# EAGLE board EEG_2 (EAGLE 9.2.2)
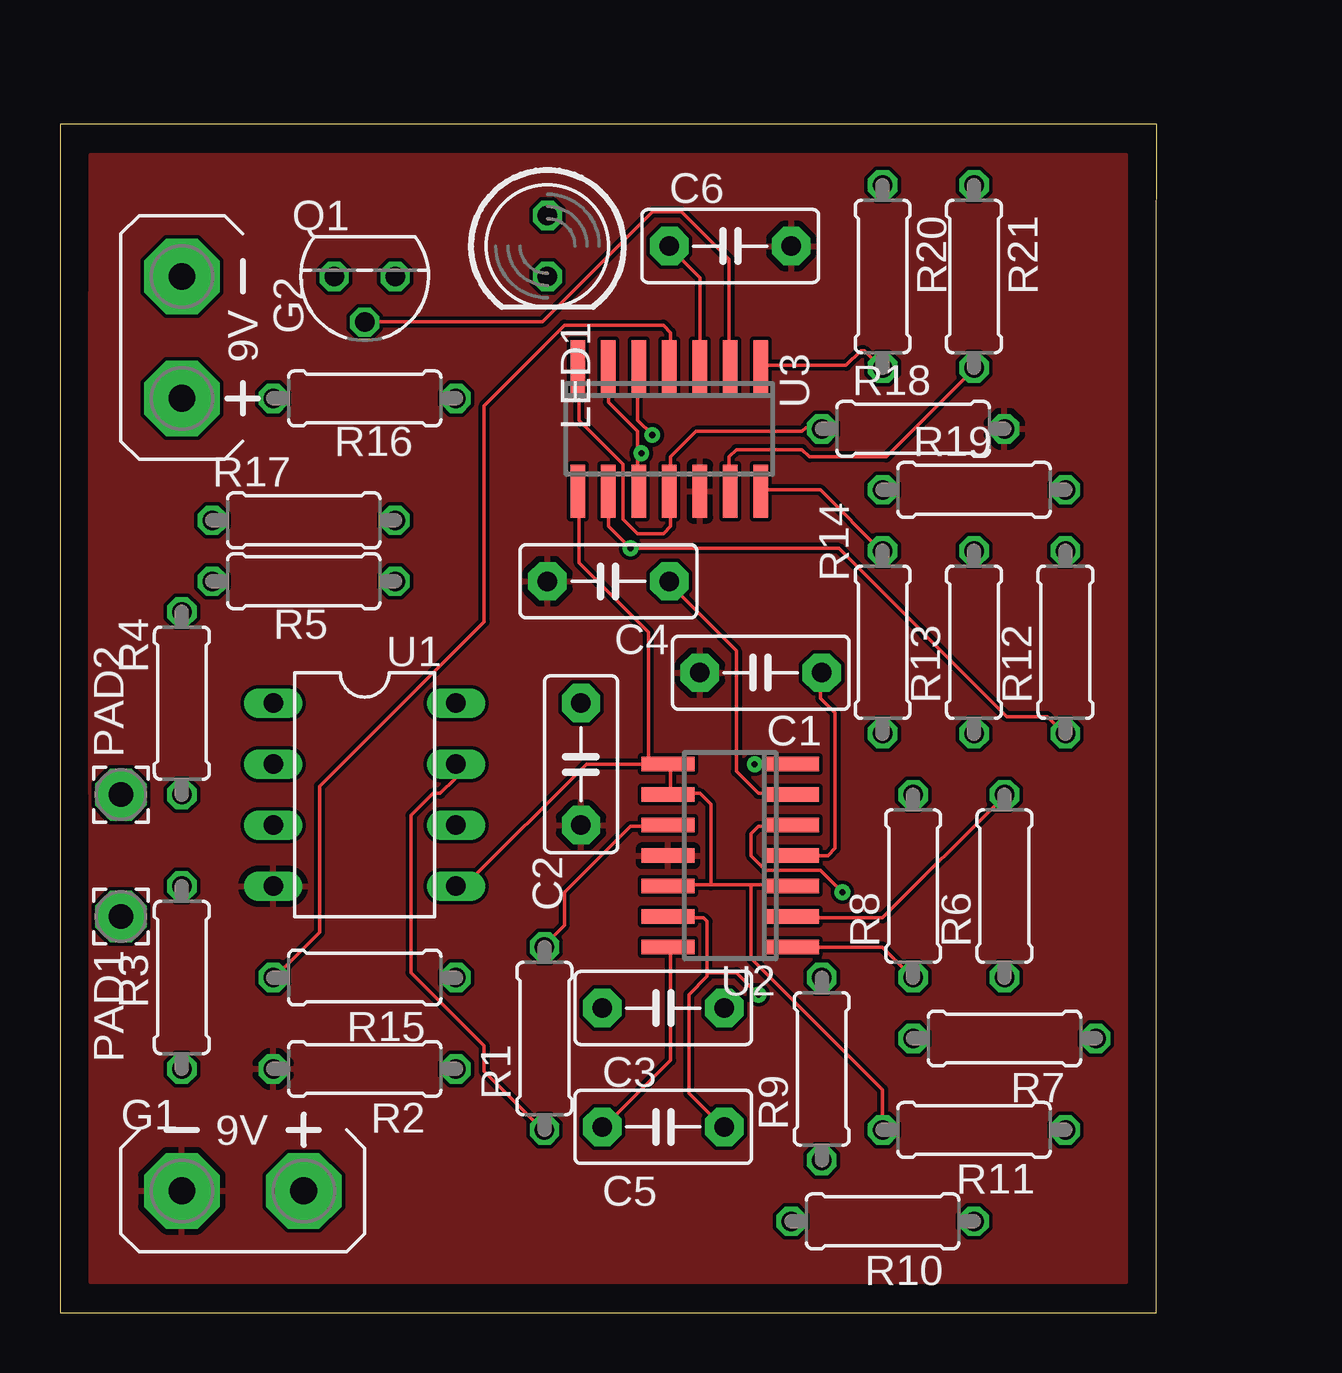
[diagram p0: board, top side]
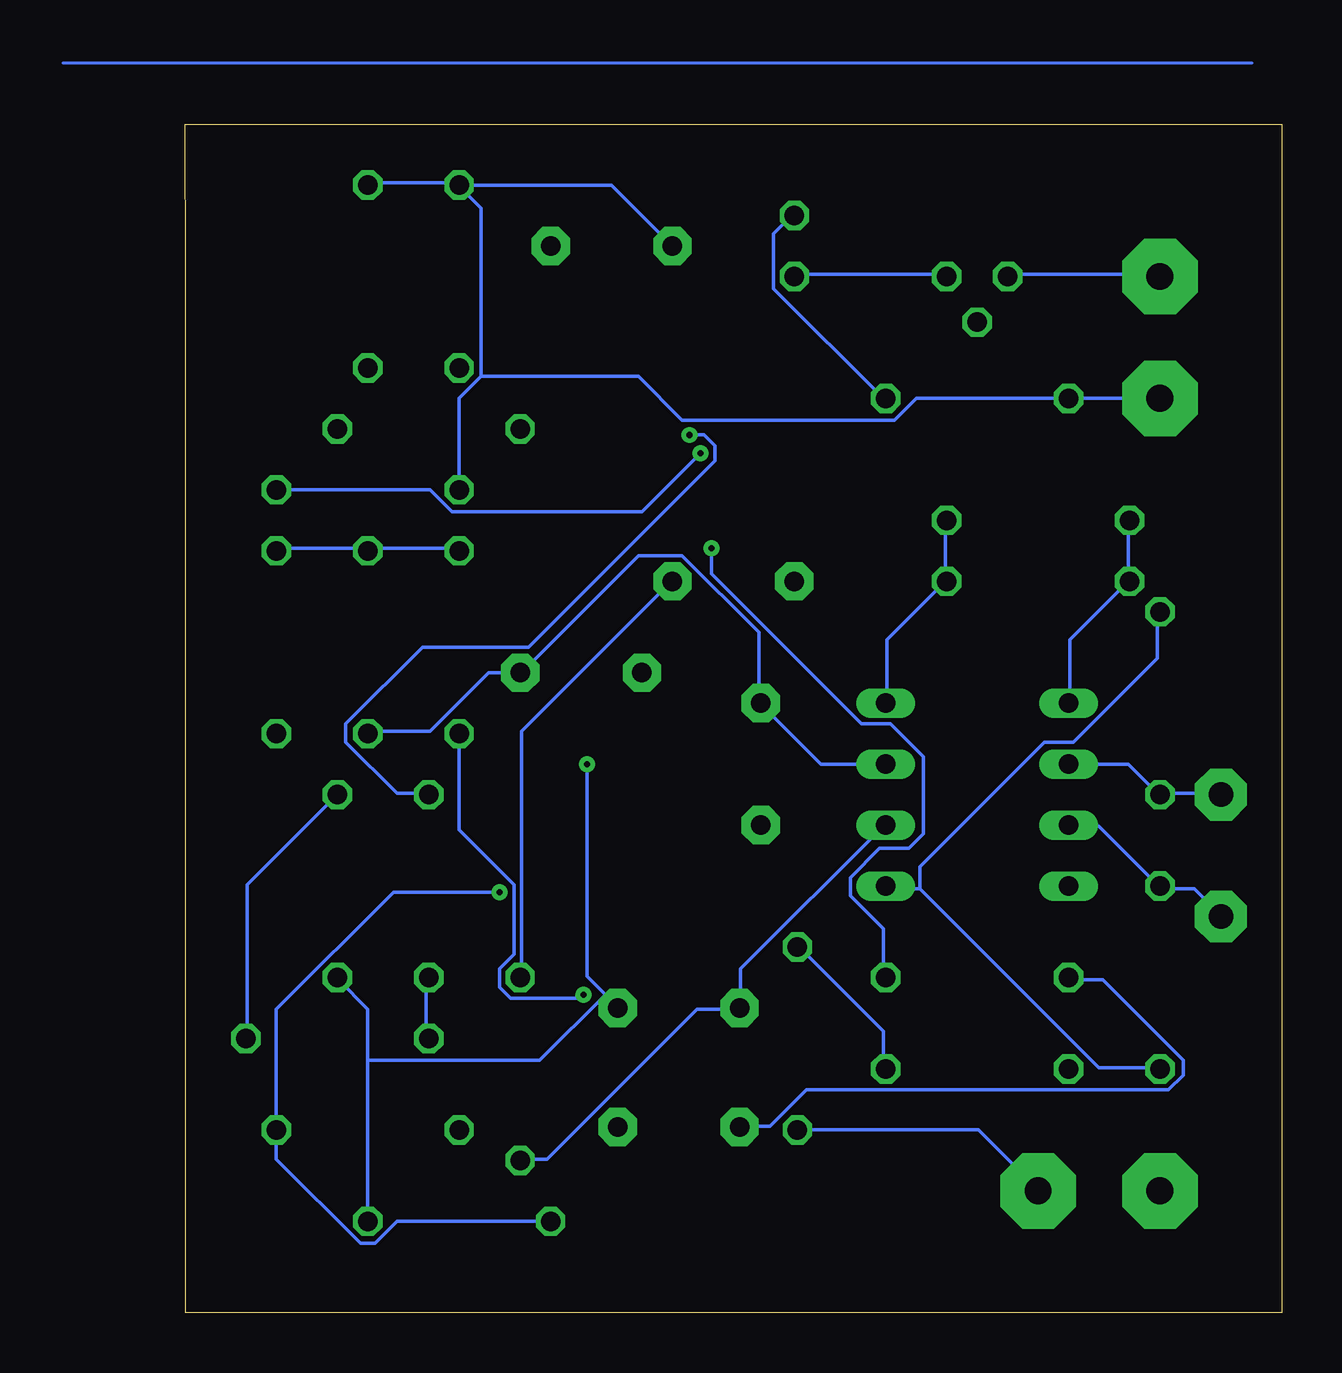
[diagram p1: board, bottom side, seen from below]

Size 45.72 x 49.53 mm. Coordinates in mm from the lower left corner, seen from the top.
Outline: 0,0 45.7,0 45.7,43.23 45.72,49.53 0,49.53 0,0
Copper layers (1*16): Top 0.035mm / dielectric 1.5mm / Bottom 0.035mm
Design rules "default *": minimum track width 6mil, minimum drill 10mil, track to track 6mil, track to pad 6mil, pad to pad 6mil, via to via 6mil, smd to smd 6mil, copper to edge 40mil, drill to drill 6mil, minimum pad ring 5mil, minimum via ring 8mil, stop-mask expansion 4mil, vias tented up to drill 0mil, thermal gap 10mil

## Footprints (pad centres in the part's own frame; a part is rotated, then mirrored left to right if it is on the bottom)
C5B3 = drill 0.813 pad 1.6 octagon: 1 -2.54,0; 2 2.54,0
AB9V = drill 1.118 pad 3.15 octagon: + 0,2.54; - 0,-2.54
LED5MM = drill 0.813 octagon: A -1.27,0; K 1.27,0
2,15/1,0 = drill 1.016 pad 2.159 octagon: 1 0,0
TO92 = drill 0.813 octagon: 1 1.27,0; 2 0,1.905; 3 -1.27,0
0207/7 = drill 0.813 octagon: 1 -3.81,0; 2 3.81,0
DIL08 = drill 0.813 long: 1 -3.81,-3.81; 2 -1.27,-3.81; 3 1.27,-3.81; 4 3.81,-3.81; 5 3.81,3.81; 6 1.27,3.81; 7 -1.27,3.81; 8 -3.81,3.81
SO14 = smd 0.6 x 2.2: 1 -3.81,-2.6; 2 -2.54,-2.6; 3 -1.27,-2.6; 4 0,-2.6; 5 1.27,-2.6; 6 2.54,-2.6; 7 3.81,-2.6; 8 3.81,2.6; 9 2.54,2.6; 10 1.27,2.6; 11 0,2.6; 12 -1.27,2.6; 13 -2.54,2.6; 14 -3.81,2.6

## Placement (x,y rotation side)
C1  0.1u  [C5B3]  29.21,26.67 180 top
C2  0.1u  [C5B3]  21.72,22.86 270 top
C3  470n  [C5B3]  25.15,12.7 0 top
C4  1u  [C5B3]  22.86,30.48 180 top
C5  10n  [C5B3]  25.15,7.75 0 top
C6  0.1u  [C5B3]  27.94,44.45 0 top
G1  AB9V  [AB9V]  7.62,5.08 270 top
G2  AB9V  [AB9V]  5.08,40.64 180 top
LED1  [LED5MM]  20.32,44.45 270 top
PAD1  [2,15/1,0]  2.54,16.51 0 top
PAD2  [2,15/1,0]  2.54,21.59 0 top
Q1  2N3906  [TO92]  12.7,43.18 180 top
R1  100k  [0207/7]  20.19,11.43 90 top
R2  100k  [0207/7]  12.7,10.16 180 top
R3  10k  [0207/7]  5.08,13.97 270 top
R4  10k  [0207/7]  5.08,25.4 90 top
R5  500  [0207/7]  10.16,30.48 0 top
R6  10k  [0207/7]  39.37,17.78 90 top
R7  100k  [0207/7]  39.37,11.43 180 top
R8  14k  [0207/7]  35.56,17.78 90 top
R9  4.2k  [0207/7]  31.75,10.16 90 top
R10  16k  [0207/7]  34.29,3.81 180 top
R11  6.8k  [0207/7]  38.1,7.62 180 top
R12  110k  [0207/7]  41.91,27.94 90 top
R13  1k  [0207/7]  38.1,27.94 90 top
R14  28k  [0207/7]  34.29,27.94 270 top
R15  98k  [0207/7]  12.7,13.97 180 top
R16  200  [0207/7]  12.7,38.1 0 top
R17  500  [0207/7]  10.16,33.02 0 top
R18  5k  [0207/7]  35.56,36.83 0 top
R19  5k  [0207/7]  38.1,34.29 0 top
R20  5k  [0207/7]  34.29,43.18 270 top
R21  5k  [0207/7]  38.1,43.18 270 top
U1  AD627N  [DIL08]  12.7,21.59 270 top
U2  LMC6484134UA  [SO14]  27.94,19.05 90 top
U3  LM239  [SO14]  25.4,36.83 180 top

## Library data of the parts
C1-C6 = capacitor-wima
G1 G2 = battery
LED1 = led
PAD1 PAD2 = wirepad
Q1 = transistor-pnp
R1-R21 = rcl; SPICEPREFIX: R
U1 = analog-devices; MF: ALTERA CORPORATION; MPN: AD627BNZ; OC_FARNELL: 1438354; OC_NEWARK: 59K4418
U2 U3 = LMC6484

## Nets
GND: C1.2 C2.2 C4.2 C6.2 G1.- R2.2 R18.2 U1.4 U2.11 U3.12
HELP: R1.2 R2.1 U2.10
IN+: PAD1.1 R3.1 U1.3
IN-: PAD2.1 R4.1 U1.2
N$1: R6.2 R7.1 U2.2
N$2: R20.2 U3.1
N$3: C3.1 R9.1 U1.6
N$4: R5.1 R17.1 U1.1
N$5: R7.2 R8.1 U2.1
N$6: R5.2 R17.2 U1.8
N$7: R10.2 R11.1 U2.5
N$9: C4.1 R9.2 U2.6
N$11: C5.2 R14.2 U2.13
N$12: R12.1 R15.1 U3.9
N$13: R12.2 R13.2 R14.1 U3.14
N$14: LED1.K Q1.3
N$15: C5.1 R15.2 U2.14 U3.4
N$16: LED1.A R16.2
N$18: R19.2 U3.6 U3.10
N$19: Q1.2 U3.2
N$20: R18.1 U3.7 U3.11
N$21: R8.2 U3.5
N$29: R21.2 U3.13
N$31: G2.- Q1.1
N$32: C3.2 R6.1 R10.1 U2.7
VCC: C1.1 C2.1 G1.+ R1.1 R13.1 U1.7 U2.4
VDD: C6.1 G2.+ R16.1 R19.1 R20.1 R21.1 U3.3
VREF: R3.2 R4.2 R11.2 U1.5 U2.3 U2.8 U2.9 U2.12 U3.8

## Tracks (layer width: path | path; a pad name or v marks a point on that pad's centre or on a via)
GND
  pour Top: 1.25,41.91 1.27,43.18 1.27,48.26 44.45,48.26 44.45,1.27 1.27,1.27
HELP
  Top 0.152: U2.10 25.3,20.27 23.77,20.27 21.03,17.53 21.03,16.15 20.12,15.24 R1.2
  Bottom 0.152: R2.1 16.61,10.21 16.61,11.73 20.12,15.24 R1.2
IN+
  Bottom 0.152: PAD1.1 2.59,16.61 3.66,17.68 5.03,17.68 R3.1 5.18,17.83 7.62,20.27 8.84,20.27 U1.3
IN-
  Bottom 0.152: PAD2.1 2.59,21.64 5.03,21.64 R4.1 5.18,21.64 6.4,22.86 U1.2
N$1
  Top 0.152: U2.2 30.63,16.46 34.29,16.46 39.32,21.49 R6.2
  Bottom 0.152: R6.2 43.13,17.83 43.13,11.43 R7.1
N$2
  Top 0.152: U3.1 29.26,39.47 32.77,39.47 33.38,40.08 33.53,40.08 34.29,39.32 R20.2
N$3
  Bottom 0.152: U1.6 16.61,20.27 22.55,14.33 22.55,12.8 C3.1 22.71,12.65 24.38,12.65 30.63,6.4 31.7,6.4 R9.1
N$4
  Bottom 0.152: 6.4,30.48 6.4,32.92 R17.1 | 6.4,30.48 8.84,28.04 8.84,25.45 U1.1 | 6.4,30.48 R5.1
N$5
  Top 0.152: U2.1 34.29,15.24 R8.1
  Bottom 0.152: R7.2 35.66,11.43 35.66,13.87 R8.1
N$6
  Bottom 0.152: 14.02,30.48 14.02,32.92 R17.2 | 14.02,30.48 16.46,28.04 16.46,25.45 U1.8 | 14.02,30.48 R5.2
N$7  (via drill 0.25)
  Top 0.152: v32.61,17.53 31.7,18.44 29.41,18.44 28.8,19.05 28.8,19.96 29.11,20.27 30.48,20.27 U2.5
  Bottom 0.152: v32.61,17.53 37.03,17.53 41.91,12.65 R11.1 41.91,6.4 38.41,2.9 37.8,2.9 36.88,3.81 R10.2
N$9
  Top 0.152: U2.6 30.48,21.64 29.11,21.64 28.19,22.55 28.19,27.58 25.3,30.48 C4.1
  Bottom 0.152: R9.2 31.7,14.02 31.7,24.23 25.45,30.48 C4.1
N$11  (via drill 0.25)
  Top 0.152: 26.98,14.17 26.98,14.02 26.21,13.26 26.21,9.14 27.58,7.77 C5.2 | 26.98,14.17 26.98,16.31 26.82,16.46 25.45,16.46 U2.13 | v29.11,13.26 28.19,14.17 26.98,14.17
  Bottom 0.152: R14.2 34.29,20.12 32,17.83 32,14.94 32.61,14.33 32.61,13.56 32.16,13.11 29.26,13.11 v29.11,13.26
N$12  (via drill 0.25)
  Top 0.152: U3.9 22.86,32.77 v23.77,31.85 32.46,31.85 39.47,24.84 41.15,24.84 41.91,24.08 R12.1
  Bottom 0.152: v23.77,31.85 23.77,30.79 17.53,24.54 16.31,24.54 14.94,23.16 14.94,19.96 15.54,19.36 16.76,19.36 17.98,18.14 17.98,17.37 16.61,16 16.61,14.02 R15.1
N$13
  Top 0.152: U3.14 29.26,34.29 31.7,34.29 34.29,31.7 R14.1
  Bottom 0.152: 38.1,31.85 34.29,31.85 R14.1 | 38.1,31.85 41.91,31.85 R12.2 | 38.1,31.85 R13.2
N$14
  Bottom 0.152: Q1.3 14.02,43.28 20.27,43.28 LED1.K
N$15
  Top 0.152: U2.14 25.45,15.24 25.45,10.52 22.71,7.77 C5.1 | U3.4 25.45,39.47 25.45,40.84 25.15,41.15 21.03,41.15 17.68,37.8 17.68,28.8 10.82,21.95 10.82,15.85 8.99,14.02 R15.2
  Bottom 0.152: C5.1 22.55,7.77 21.34,7.77 19.81,9.3 4.72,9.3 4.12,9.91 4.12,10.52 7.47,13.87 8.84,13.87 R15.2
N$16
  Bottom 0.152: R16.2 16.61,38.1 21.18,42.67 21.18,44.96 20.42,45.72 LED1.A
N$18  (via drill 0.25)
  Top 0.152: 24.08,35.81 24.08,36.73 22.86,37.95 U3.6 | 24.08,35.81 24.08,34.29 U3.10 | 24.08,35.81 v24.23,35.81
  Bottom 0.152: R19.2 35.51,34.29 34.59,33.38 26.67,33.38 v24.23,35.81
N$19
  Top 0.152: U3.2 27.89,39.47 27.89,43.89 25.91,45.87 24.69,45.87 20.12,41.3 12.8,41.3 Q1.2
N$20
  Top 0.152: R18.1 31.7,36.88 31.09,36.88 30.94,36.73 26.52,36.73 25.45,35.66 25.45,34.29 U3.11 25.45,34.14 25.45,32.77 25.15,32.46 24.08,32.46 23.47,33.07 23.47,35.36 21.64,37.19 21.64,39.32 U3.7
N$21  (via drill 0.25)
  Top 0.152: v24.69,36.58 24.08,37.19 24.08,39.32 U3.5
  Bottom 0.152: v24.69,36.58 24.08,36.58 23.62,36.12 23.62,35.51 31.39,27.74 35.81,27.74 39.01,24.54 39.01,23.77 36.88,21.64 35.66,21.64 R8.2
N$29
  Top 0.152: U3.13 27.89,34.29 27.89,35.66 28.19,35.97 30.94,35.97 31.24,35.66 34.44,35.66 38.1,39.32 R21.2
N$31
  Bottom 0.152: Q1.1 11.43,43.28 5.18,43.28 G2.-
N$32  (via drill 0.25)
  Top 0.152: v28.96,22.86 U2.7
  Bottom 0.152: 38.1,10.52 38.1,12.65 39.32,13.87 R6.1 | 38.1,10.52 R10.1 | v28.96,22.86 28.96,14.02 28.19,13.26 | 28.19,13.26 27.74,12.8 C3.2 28.19,13.26 | 38.1,10.52 30.94,10.52 28.19,13.26
VCC
  Top 0.152: U2.4 32,19.05 32.31,19.36 32.31,24.99 31.7,25.6 31.7,26.67 C1.1 | R1.1 20.12,7.62 17.68,10.06 17.68,11.12 14.63,14.17 14.63,20.73 15.54,21.64 15.85,21.64 16.46,22.25 16.46,22.86 U1.7
  Bottom 0.152: R1.1 12.65,7.62 10.21,5.18 G1.+ | U1.7 19.2,22.86 21.64,25.3 C2.1 21.79,25.45 21.79,28.35 24.99,31.55 26.82,31.55 31.7,26.67 C1.1 33.07,26.67 35.51,24.23 38.1,24.23 R13.1
VDD
  Top 0.152: U3.3 26.67,43.13 25.45,44.35 C6.1
  Bottom 0.152: G2.+ R16.1 15.24,38.1 16.15,37.19 24.99,37.19 26.82,39.01 33.38,39.01 | R19.1 34.29,38.1 33.38,39.01 | 33.38,39.01 33.38,46.02 34.29,46.94 R20.1 | R21.1 38.1,47.09 34.29,47.09 R20.1 | C6.1 27.94,46.99 R20.1
VREF
  Top 0.152: 25.45,21.64 25.45,22.86 U2.8 24.84,22.86 24.54,23.16 | 24.54,23.16 24.54,28.35 21.64,31.24 21.64,34.14 U3.8 | 28.8,17.83 30.48,17.83 U2.3 | 28.8,17.83 27.13,17.83 | 27.13,17.83 25.45,17.83 U2.12 | R11.2 34.29,9.3 28.8,14.78 28.8,17.83 | 25.45,21.64 26.67,21.64 27.13,21.18 27.13,17.83 | 25.45,21.64 U2.9 | 24.54,23.16 24.23,22.86 21.95,22.86 16.92,17.83 16.61,17.83 U1.5
  Bottom 0.152: 15.09,17.68 7.62,10.21 5.18,10.21 R3.2 | 15.09,17.68 16.46,17.68 U1.5 | 15.09,17.68 15.09,18.59 9.91,23.77 8.69,23.77 5.18,27.28 5.18,29.11 R4.2
(copper drawn outside any net)
  shapes: Bottom area x1, Top area x1